# EAGLE board rgb_comm (EAGLE 6.6.0)

Size 39.95 x 11.42 mm. Coordinates in mm from the lower left corner, seen from the top.
Outline: 0,0 39.95,0 39.95,11.42 0,11.42 0,0
Copper layers (1*16): Top 0.035mm / dielectric 1.5mm / Bottom 0.035mm
Design rules "default": minimum track width 10mil, minimum drill 24mil, track to track 8mil, track to pad 8mil, pad to pad 8mil, via to via 8mil, smd to smd 8mil, copper to edge 40mil, drill to drill 8mil, minimum pad ring 10mil, minimum via ring 8mil, stop-mask expansion 4mil, vias tented up to drill 0mil, thermal gap 10mil

## Footprints (pad centres in the part's own frame; a part is rotated, then mirrored left to right if it is on the bottom)
C0805 = smd 1.3 x 1.5: 1 -0.85,0; 2 0.85,0
ADAFRUIT_RGBLED5050 = smd 2 x 1.1: 1 -2,1.7; 2 -2,0; 3 -2,-1.7; 4 2,-1.7; 5 2,0; 6 2,1.7
JP1 = drill 0.914 long: 1 0,-1.27; 2 0,1.27
M0805 = smd 1.3 x 1.6: 1 -0.95,0; 2 0.95,0
MA04-1 = drill 1.016 long: 1 -3.81,0; 2 -1.27,0; 3 1.27,0; 4 3.81,0
PW14 = smd 0.3 x 1.2: 1 -1.95,-2.9; 2 -1.3,-2.9; 3 -0.65,-2.9; 4 0,-2.9; 5 0.65,-2.9; 6 1.3,-2.9; 7 1.95,-2.9; 8 1.95,2.9; 9 1.3,2.9; 10 0.65,2.9; 11 0,2.9; 12 -0.65,2.9; 13 -1.3,2.9; 14 -1.95,2.9
APDS9950 = smd 1.362 x 0.72: P$1 0.954,1.4; P$2 0.954,0.43; P$3 0.954,-0.54; P$4 0.954,-1.51; P$5 -0.954,-1.5; P$6 -0.954,-0.53; P$7 -0.954,0.44; P$8 -0.954,1.41

## Placement (x,y rotation side)
C1  10uF  [C0805]  5.49,8.94 90 bottom
C4  100n  [C0805]  8.03,8.94 90 bottom
C5  10uF  [C0805]  36.88,5.18 0 top
LED1  ADAFRUIT_RGBLED5050  [ADAFRUIT_RGBLED5050]  31.7,5.79 0 top
PROG  [JP1]  17.02,9.75 90 top
R1  4k7  [M0805]  7.87,2.39 90 bottom
R2  4k7  [M0805]  5.38,4.78 90 bottom
R3  330  [M0805]  26.52,3.35 180 top
R4  330  [M0805]  26.52,8.23 180 top
R5  330  [M0805]  26.52,5.79 180 top
R22  47k  [M0805]  11.89,8.53 0 top
SV2  [MA04-1]  2.13,5.18 270 top
U$1  G2X[0/1]1---PW14  [PW14]  13,3.71 90 top
U$2  APDS9950  [APDS9950]  37.19,8.84 90 top

## Library data of the parts
C1 C4 C5 R1-R5 R22 = resistor
LED1 = universal_node
PROG = jumper
SV2 = con-lstb; OC_FARNELL: unknown; OC_NEWARK: unknown
U$1 U$2 = my_parts

## Nets
+3V3: C1.1 C4.1 C5.1 R1.2 R2.2 R22.1 SV2.2 U$1.1 U$2.P$5 U$2.P$8
GND: C1.2 C4.2 C5.2 LED1.4 LED1.5 LED1.6 SV2.1 U$1.14 U$2.P$6
N$1: PROG.1 U$1.11
N$2: PROG.2 R22.2 U$1.10
N$3: LED1.3 R3.1
N$4: LED1.1 R4.1
N$7: U$2.P$3 U$2.P$4
N$8: LED1.2 R5.1
N$9: R3.2 U$1.2
N$10: R4.2 U$1.3
N$11: R5.2 U$1.4
SCL: R2.1 SV2.3 U$1.8 U$2.P$7
SDA: R1.1 SV2.4 U$1.9 U$2.P$1

## Tracks (layer width: path | path; a pad name or v marks a point on that pad's centre or on a via)
+3V3  (9 unrouted)
GND  (8 unrouted)
N$1  (1 unrouted)
N$2  (2 unrouted)
N$3  (1 unrouted)
N$4  (1 unrouted)
N$7  (1 unrouted)
N$8  (1 unrouted)
N$9  (1 unrouted)
N$10  (1 unrouted)
N$11  (1 unrouted)
SCL  (3 unrouted)
SDA  (3 unrouted)